# Altium PCB 180222.PcbDoc (part 2 of 5)
Units mil, origin at the board's own origin, x right, y up, seen from the top; angles counter-clockwise.
Board outline 6880.23 x 4505.03 mil, 2 copper layers (Top Layer, Bottom Layer); 136 components, 176 nets, 656 pads, 225 vias.
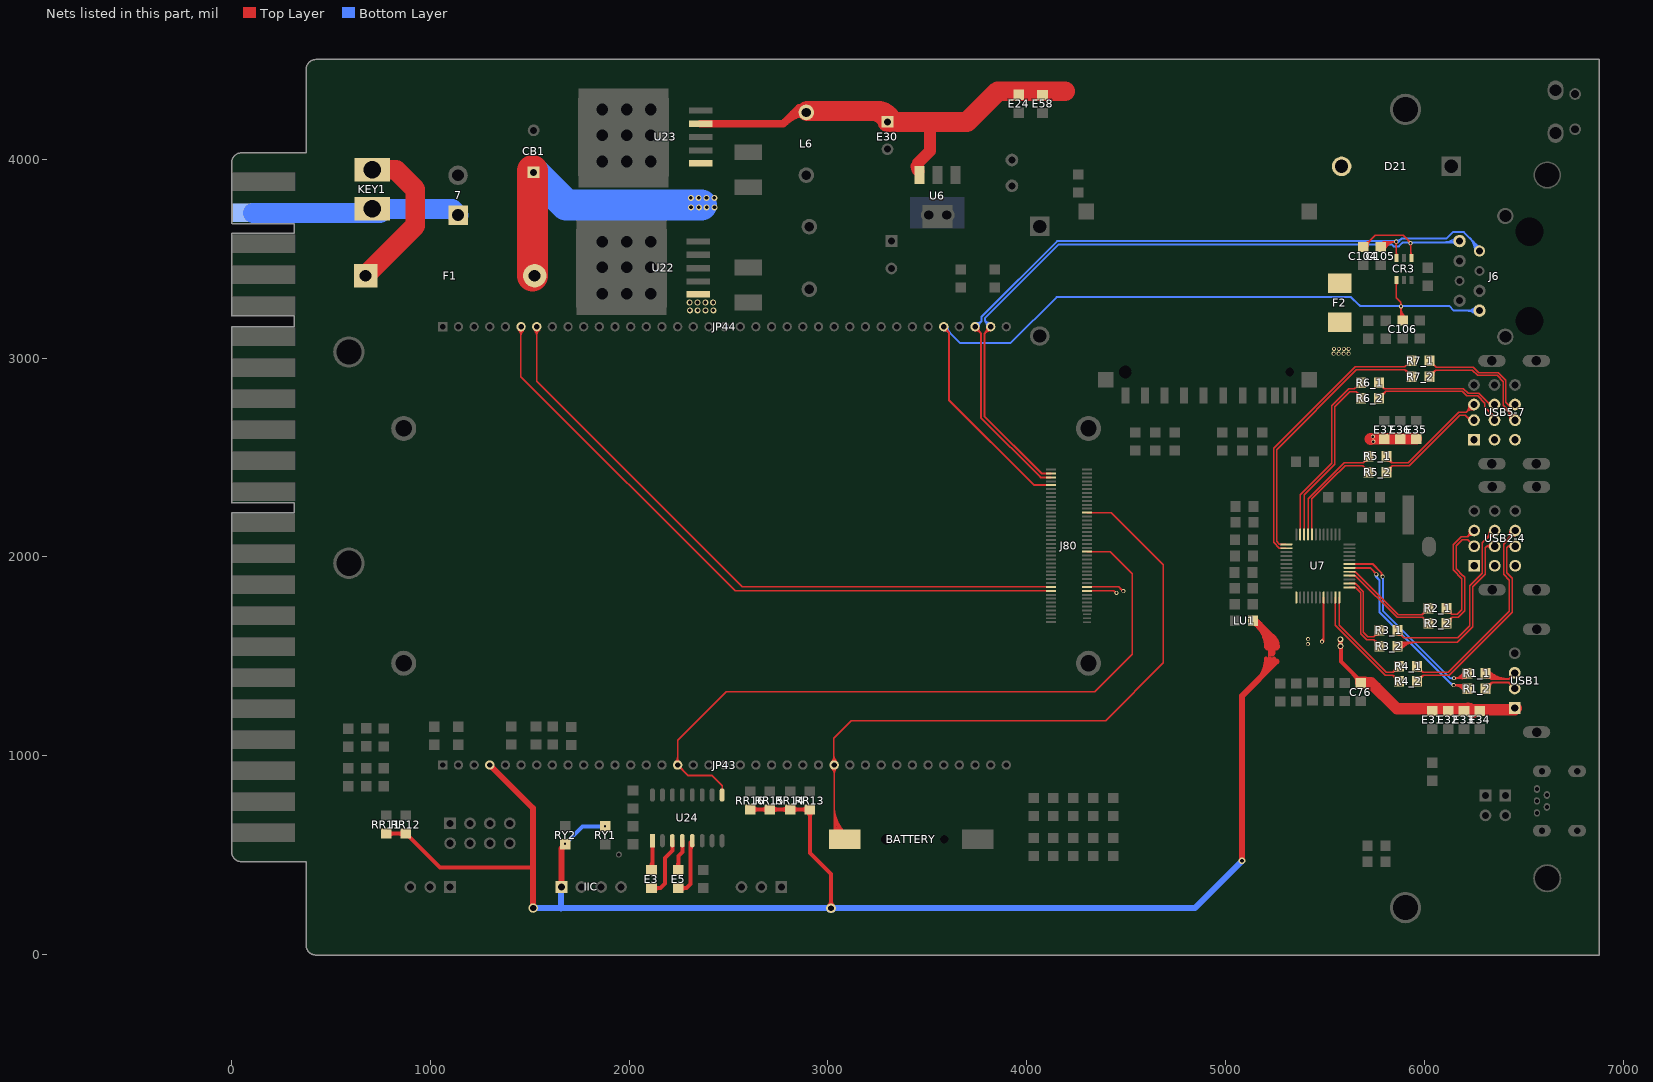
[diagram p2: the nets of this part, all layers, seen from the top]

## Via types
v1: diameter 20, hole 12, Top Layer to Bottom Layer, 169 vias
v2: diameter 30, hole 18, Top Layer to Bottom Layer, 30 vias
v3: diameter 35, hole 20, Top Layer to Bottom Layer, 25 vias
v4: diameter 50, hole 28, Top Layer to Bottom Layer, 1 vias

## Nets (pads, with @x,y where several pads share a name; then routed paths per layer and width w, separated by ;. In a path a pad name is that pad's centre, name@x,y a point inside that pad or via, vN(x,y) a via of type N, cw(c..) or ccw(c..) an arc to the next point about the centre after c; other vN are vias at no path point) (continued)
-TXD_1: J80.19 JP43.16 U24.9 | length 3976.7
  Top Layer w7: JP43.16@2242,952 2244,954 2244,1079 2488,1323 4344,1323 4531,1510 4531,1915 ; J80.19@4303.55,2026.47 4420.11,2026.47 4530.5,1916.09 ; JP43.16@2230.01,961.87 ccw(c2196.22,995.65) 2244,995.65 ; JP43.16@2230.01,961.87 ccw(c2196.22,995.65) 2244,995.65 ; JP43.16@2230.01,961.87 ccw(c2196.22,995.65) 2244,995.65 ; JP43.16@2234.96,956.92 ccw(c2213.12,978.75) 2244,978.75 ; JP43.16@2234.96,956.92 ccw(c2213.12,978.75) 2244,978.75 ; JP43.16@2234.96,956.92 ccw(c2213.12,978.75) 2244,978.75 ; 2244,979.89 ccw(c2276.48,979.89) JP43.16@2253.51,956.92 ; 2244,979.89 ccw(c2276.48,979.89) JP43.16@2253.51,956.92 ; 2244,979.89 ccw(c2276.48,979.89) JP43.16@2253.51,956.92 ; 2244,996.78 ccw(c2293.38,996.78) JP43.16@2258.46,961.87 ; 2244,996.78 ccw(c2293.38,996.78) JP43.16@2258.46,961.87 ; 2244,996.78 ccw(c2293.38,996.78) JP43.16@2258.46,961.87
  Top Layer w10: JP43.16@2244.5,953.64 2296.13,902 2417,902 2469,850 U24.9@2469,793
  Top Layer w15: U24.9@2466,790 U24.9@2466,793
ADC0: J80.9 | length 153.7
  Top Layer w7: J80.9@4303.55,1829.62 4439.38,1829.62 v1@4452,1817
  other v1: 4452,1820
ADC1: J80.72 JP44.6 | length 3738.9
  Top Layer w7: JP44.6@1456,3155 1456,2907 2533.38,1829.62 J80.72@4122.45,1829.62 ; JP44.6@1442.87,3144.13 cw(c1411.16,3112.43) 1456,3112.43 ; JP44.6@1442.87,3144.13 cw(c1411.16,3112.43) 1456,3112.43 ; JP44.6@1442.87,3144.13 cw(c1411.16,3112.43) 1456,3112.43 ; JP44.6@1447.82,3149.08 cw(c1428.06,3129.32) 1456,3129.32 ; JP44.6@1447.82,3149.08 cw(c1428.06,3129.32) 1456,3129.32 ; JP44.6@1447.82,3149.08 cw(c1428.06,3129.32) 1456,3129.32 ; 1456,3107.14 cw(c1508.31,3107.14) JP44.6@1471.32,3144.13 ; 1456,3107.14 cw(c1508.31,3107.14) JP44.6@1471.32,3144.13 ; 1456,3107.14 cw(c1508.31,3107.14) JP44.6@1471.32,3144.13 ; 1456,3124.04 cw(c1491.42,3124.04) JP44.6@1466.37,3149.08 ; 1456,3124.04 cw(c1491.42,3124.04) JP44.6@1466.37,3149.08 ; 1456,3124.04 cw(c1491.42,3124.04) JP44.6@1466.37,3149.08
ADC2: J80.10 | length 240.7
  Top Layer w7: J80.10@4303.55,1849.31 4462.69,1849.31 v1@4485.5,1826.5 ; 4470.78,1841.22 ccw(c4487,1857.43) 4487,1834.5 cw(c4487,1857.43) 4470.78,1841.22 ; 4478.03,1833.97 cw(c4472.05,1828) 4480.5,1828 ccw(c4472.05,1828) 4478.03,1833.97
  other v1: 4487,1828
ADC3: J80.71 JP44.7 | length 3664.2
  Top Layer w7: JP44.7@1536,3155 1536,2884 2570.69,1849.31 J80.71@4122.45,1849.31 ; JP44.7@1521.61,3144.13 cw(c1486.86,3109.38) 1536,3109.38 ; JP44.7@1521.61,3144.13 cw(c1486.86,3109.38) 1536,3109.38 ; JP44.7@1521.61,3144.13 cw(c1486.86,3109.38) 1536,3109.38 ; JP44.7@1526.56,3149.08 cw(c1503.76,3126.28) 1536,3126.28 ; JP44.7@1526.56,3149.08 cw(c1503.76,3126.28) 1536,3126.28 ; JP44.7@1526.56,3149.08 cw(c1503.76,3126.28) 1536,3126.28 ; 1536,3110.18 cw(c1584.01,3110.18) JP44.7@1550.06,3144.13 ; 1536,3110.18 cw(c1584.01,3110.18) JP44.7@1550.06,3144.13 ; 1536,3110.18 cw(c1584.01,3110.18) JP44.7@1550.06,3144.13 ; 1536,3127.08 cw(c1567.11,3127.08) JP44.7@1545.11,3149.08 ; 1536,3127.08 cw(c1567.11,3127.08) JP44.7@1545.11,3149.08 ; 1536,3127.08 cw(c1567.11,3127.08) JP44.7@1545.11,3149.08
ADC23: 
BATTERY: BATTERY.1 J80.29 JP43.26 | length 6668.2
  Top Layer w7: JP43.26@3030,943 3030,1087 3119,1176 4397,1176 4688,1467 4688,1960 4424.68,2223.32 J80.29@4303.55,2223.32 ; BATTERY.1@3031.9,562 JP43.26@3031.9,953.64 ; JP43.26@3017.67,939.41 cw(c2983.32,905.06) 3031.9,905.06 ; JP43.26@3017.67,939.41 cw(c2983.32,905.06) 3031.9,905.06 ; JP43.26@3017.67,939.41 cw(c2983.32,905.06) 3031.9,905.06 ; JP43.26@3017.67,967.87 ccw(c2987.9,997.64) 3030,997.64 ; JP43.26@3017.67,967.87 ccw(c2987.9,997.64) 3030,997.64 ; JP43.26@3017.67,967.87 ccw(c2987.9,997.64) 3030,997.64 ; JP43.26@3022.62,944.36 cw(c3000.22,921.96) 3031.9,921.96 ; JP43.26@3022.62,944.36 cw(c3000.22,921.96) 3031.9,921.96 ; JP43.26@3022.62,944.36 cw(c3000.22,921.96) 3031.9,921.96 ; JP43.26@3022.62,962.92 ccw(c3004.79,980.74) 3030,980.74 ; JP43.26@3022.62,962.92 ccw(c3004.79,980.74) 3030,980.74 ; JP43.26@3022.62,962.92 ccw(c3004.79,980.74) 3030,980.74 ; BATTERY.1@3023.53,612.36 ccw(c3003.32,632.56) 3031.9,632.56 ; BATTERY.1@3023.53,612.36 ccw(c3003.32,632.56) 3031.9,632.56 ; BATTERY.1@3023.53,612.36 ccw(c3003.32,632.56) 3031.9,632.56 ; 3030,989.89 ccw(c3068.15,989.89) JP43.26@3041.17,962.92 ; 3030,989.89 ccw(c3068.15,989.89) JP43.26@3041.17,962.92 ; 3030,989.89 ccw(c3068.15,989.89) JP43.26@3041.17,962.92 ; 3030,1006.79 ccw(c3085.05,1006.79) JP43.26@3046.12,967.87 ; 3030,1006.79 ccw(c3085.05,1006.79) JP43.26@3046.12,967.87 ; 3030,1006.79 ccw(c3085.05,1006.79) JP43.26@3046.12,967.87 ; 3031.9,629.93 ccw(c3105.74,629.93) BATTERY.1@3053.53,577.71 ; 3031.9,629.93 ccw(c3105.74,629.93) BATTERY.1@3053.53,577.71 ; 3031.9,629.93 ccw(c3105.74,629.93) BATTERY.1@3053.53,577.71 ; 3031.9,646.83 ccw(c3122.64,646.83) BATTERY.1@3058.48,582.66 ; 3031.9,646.83 ccw(c3122.64,646.83) BATTERY.1@3058.48,582.66 ; 3031.9,646.83 ccw(c3122.64,646.83) BATTERY.1@3058.48,582.66 ; 3031.9,663.72 ccw(c3139.54,663.72) BATTERY.1@3063.43,587.61 ; 3031.9,663.72 ccw(c3139.54,663.72) BATTERY.1@3063.43,587.61 ; 3031.9,663.72 ccw(c3139.54,663.72) BATTERY.1@3063.43,587.61 ; 3031.9,680.62 ccw(c3156.44,680.62) BATTERY.1@3068.38,592.56 ; 3031.9,680.62 ccw(c3156.44,680.62) BATTERY.1@3068.38,592.56 ; 3031.9,680.62 ccw(c3156.44,680.62) BATTERY.1@3068.38,592.56 ; 3031.9,697.52 ccw(c3173.34,697.52) BATTERY.1@3073.32,597.51 ; 3031.9,697.52 ccw(c3173.34,697.52) BATTERY.1@3073.32,597.51 ; 3031.9,697.52 ccw(c3173.34,697.52) BATTERY.1@3073.32,597.51 ; 3031.9,714.42 ccw(c3190.24,714.42) BATTERY.1@3078.27,602.46 ; 3031.9,714.42 ccw(c3190.24,714.42) BATTERY.1@3078.27,602.46 ; 3031.9,714.42 ccw(c3190.24,714.42) BATTERY.1@3078.27,602.46 ; 3031.9,731.32 ccw(c3207.14,731.32) BATTERY.1@3083.22,607.41 ; 3031.9,731.32 ccw(c3207.14,731.32) BATTERY.1@3083.22,607.41 ; 3031.9,731.32 ccw(c3207.14,731.32) BATTERY.1@3083.22,607.41 ; 3031.9,748.22 ccw(c3224.04,748.22) BATTERY.1@3088.17,612.36 ; 3031.9,748.22 ccw(c3224.04,748.22) BATTERY.1@3088.17,612.36 ; 3031.9,748.22 ccw(c3224.04,748.22) BATTERY.1@3088.17,612.36 ; 3031.9,905.06 cw(c3080.47,905.06) JP43.26@3046.12,939.41 ; 3031.9,905.06 cw(c3080.47,905.06) JP43.26@3046.12,939.41 ; 3031.9,905.06 cw(c3080.47,905.06) JP43.26@3046.12,939.41 ; 3031.9,921.96 cw(c3063.58,921.96) JP43.26@3041.17,944.36 ; 3031.9,921.96 cw(c3063.58,921.96) JP43.26@3041.17,944.36 ; 3031.9,921.96 cw(c3063.58,921.96) JP43.26@3041.17,944.36
C1+: E3.1 U24.1 | length 197.2
  Top Layer w20: E3.1@2102.96,435.93 ccw(c2066.65,472.24) 2118,472.24 ; E3.1@2118,434.91 U24.1@2118,573 ; 2118,452.85 ccw(c2141.93,452.85) E3.1@2125.01,435.93
C1-: E3.2 U24.3 | length 367.2
  Top Layer w20: E3.2@2113,334.35 2157.35,334.35 2181,358 2181,486 2218,523 U24.3@2218,573 ; E3.2@2125.01,323.33 cw(c2151.62,296.72) 2151.62,334.35 cw(c2151.62,371.99) E3.2@2125.01,345.38
C2+: E5.1 U24.4 | length 215.5
  Top Layer w20: E5.1@2236.98,435.93 ccw(c2210.36,462.54) 2248,462.54 ccw(c2285.64,462.54) E5.1@2259.02,435.93 ; E5.1@2248,424.91 2248,496 2268,516 U24.4@2268,573
C2-: E5.2 U24.5 | length 378.3
  Top Layer w20: E5.2@2248,334.35 2288.35,334.35 2309,355 2309,564 U24.5@2318,573 ; E5.2@2260.01,323.33 cw(c2286.62,296.72) 2286.62,334.35 cw(c2286.62,371.99) E5.2@2260.01,345.38 ; 2309,524.97 cw(c2344.58,524.97) U24.5@2319.42,550.12
DC5V: C76.1 E31.1 E32.1 E33.1 E34.1 E35.1 E36.1 E37.1 F2.1 IIC.1 JP43.4 LU1.1 pad.3@1518,234 RR11.2 RR12.2 RR13.2 RR14.2 RR15.2 RR16.2 RY1.1 RY2.2 U7.8 USB1.1 USB2-4.1 USB2-4.5 USB2-4.9 USB5-7.1 USB5-7.5 USB5-7.9 | length 13763.4
  Top Layer w10: 5218,1461 5218,1558 ; 5494.41,1585.41 U7.8@5494.41,1796.89 ; v1@5482.46,1577.54 ccw(c5453.63,1606.37) 5494.41,1606.37 cw(c5453.63,1606.37) v1@5482.46,1577.54 ; v1@5489.54,1570.46 ccw(c5477.77,1582.23) 5494.41,1582.23 cw(c5477.77,1582.23) v1@5489.54,1570.46
  Top Layer w20: RR11.2@778,608.35 RR12.2@878,608.35 1048.35,438 1517,438 ; RR16.2@2609,729.35 2910.65,729.35 2910.65,510.35 3016,405 v4(3016,233) ; v2@5576,1586 5579,1583 v2(5579,1552) ; v2@5581,1561 5581,1474 5674,1381 C76.1@5674,1374 ; RR11.2@790.01,597.33 cw(c816.62,570.72) 816.62,608.35 ; RR11.2@790.01,597.33 cw(c816.62,570.72) 816.62,608.35 ; RR11.2@790.01,597.33 cw(c816.62,570.72) 816.62,608.35 ; RR11.2@790.01,619.38 ccw(c816.62,645.99) 816.62,608.35 ; RR11.2@790.01,619.38 ccw(c816.62,645.99) 816.62,608.35 ; RR11.2@790.01,619.38 ccw(c816.62,645.99) 816.62,608.35 ; 839.38,608.35 cw(c839.38,570.72) RR12.2@865.99,597.33 ; 839.38,608.35 ccw(c839.38,645.99) RR12.2@865.99,619.38 ; 839.38,608.35 cw(c839.38,570.72) RR12.2@865.99,597.33 ; 839.38,608.35 ccw(c839.38,645.99) RR12.2@865.99,619.38 ; 839.38,608.35 ccw(c839.38,645.99) RR12.2@865.99,619.38 ; 839.38,608.35 cw(c839.38,570.72) RR12.2@865.99,597.33 ; RR16.2@2621.01,718.33 cw(c2647.62,691.72) 2647.62,729.35 ; RR16.2@2621.01,718.33 cw(c2647.62,691.72) 2647.62,729.35 ; RR16.2@2621.01,718.33 cw(c2647.62,691.72) 2647.62,729.35 ; RR16.2@2621.01,740.38 ccw(c2647.62,766.99) 2647.62,729.35 ; RR16.2@2621.01,740.38 ccw(c2647.62,766.99) 2647.62,729.35 ; RR16.2@2621.01,740.38 ccw(c2647.62,766.99) 2647.62,729.35 ; 2670.38,729.35 cw(c2670.38,691.72) RR15.2@2696.99,718.33 ; 2670.38,729.35 ccw(c2670.38,766.99) RR15.2@2696.99,740.38 ; 2670.38,729.35 cw(c2670.38,691.72) RR15.2@2696.99,718.33 ; 2670.38,729.35 ccw(c2670.38,766.99) RR15.2@2696.99,740.38 ; 2670.38,729.35 ccw(c2670.38,766.99) RR15.2@2696.99,740.38 ; 2670.38,729.35 cw(c2670.38,691.72) RR15.2@2696.99,718.33 ; RR15.2@2721.01,718.33 cw(c2747.62,691.72) 2747.62,729.35 ; RR15.2@2721.01,718.33 cw(c2747.62,691.72) 2747.62,729.35 ; RR15.2@2721.01,718.33 cw(c2747.62,691.72) 2747.62,729.35 ; RR15.2@2721.01,740.38 ccw(c2747.62,766.99) 2747.62,729.35 ; RR15.2@2721.01,740.38 ccw(c2747.62,766.99) 2747.62,729.35 ; RR15.2@2721.01,740.38 ccw(c2747.62,766.99) 2747.62,729.35 ; 2771.38,729.35 cw(c2771.38,691.72) RR14.2@2797.99,718.33 ; 2771.38,729.35 ccw(c2771.38,766.99) RR14.2@2797.99,740.38 ; 2771.38,729.35 cw(c2771.38,691.72) RR14.2@2797.99,718.33 ; 2771.38,729.35 ccw(c2771.38,766.99) RR14.2@2797.99,740.38 ; 2771.38,729.35 ccw(c2771.38,766.99) RR14.2@2797.99,740.38 ; 2771.38,729.35 cw(c2771.38,691.72) RR14.2@2797.99,718.33 ; RR14.2@2822.01,718.33 cw(c2848.62,691.72) 2848.62,729.35 ; RR14.2@2822.01,718.33 cw(c2848.62,691.72) 2848.62,729.35 ; RR14.2@2822.01,718.33 cw(c2848.62,691.72) 2848.62,729.35 ; RR14.2@2822.01,740.38 ccw(c2848.62,766.99) 2848.62,729.35 ; RR14.2@2822.01,740.38 ccw(c2848.62,766.99) 2848.62,729.35 ; RR14.2@2822.01,740.38 ccw(c2848.62,766.99) 2848.62,729.35 ; 2870.38,729.35 cw(c2870.38,691.72) RR13.2@2896.99,718.33 ; 2870.38,729.35 ccw(c2870.38,766.99) RR13.2@2896.99,740.38 ; 2870.38,729.35 cw(c2870.38,691.72) RR13.2@2896.99,718.33 ; 2870.38,729.35 ccw(c2870.38,766.99) RR13.2@2896.99,740.38 ; 2870.38,729.35 ccw(c2870.38,766.99) RR13.2@2896.99,740.38 ; 2870.38,729.35 cw(c2870.38,691.72) RR13.2@2896.99,718.33 ; RR13.2@2898.96,718.33 cw(c2870.75,690.12) 2910.65,690.12 ; RR13.2@2898.96,718.33 cw(c2870.75,690.12) 2910.65,690.12 ; RR13.2@2898.96,718.33 cw(c2870.75,690.12) 2910.65,690.12 ; 2910.65,693.31 cw(c2946.03,693.31) RR13.2@2921.01,718.33 ; 2910.65,693.31 cw(c2946.03,693.31) RR13.2@2921.01,718.33 ; 2910.65,693.31 cw(c2946.03,693.31) RR13.2@2921.01,718.33 ; v4@3005.39,243.61 ccw(c2979.79,269.21) 3016,269.21 ; v4@3005.39,243.61 ccw(c2979.79,269.21) 3016,269.21 ; v4@3005.39,243.61 ccw(c2979.79,269.21) 3016,269.21 ; 3016,269.21 ccw(c3052.21,269.21) v4@3026.61,243.61 ; 3016,269.21 ccw(c3052.21,269.21) v4@3026.61,243.61 ; 3016,269.21 ccw(c3052.21,269.21) v4@3026.61,243.61 ; v3@5078.7,477.3 ccw(c5065.89,490.11) 5084,490.11 ; v3@5078.7,477.3 ccw(c5065.89,490.11) 5084,490.11 ; v3@5078.7,477.3 ccw(c5065.89,490.11) 5084,490.11 ; 5084,490.11 ccw(c5102.11,490.11) v3@5089.3,477.3 ; 5084,490.11 ccw(c5102.11,490.11) v3@5089.3,477.3 ; 5084,490.11 ccw(c5102.11,490.11) v3@5089.3,477.3 ; v2@5575.46,1548.46 cw(c5562.1,1535.1) 5581,1535.1 ; v2@5575.46,1548.46 cw(c5562.1,1535.1) 5581,1535.1 ; v2@5575.46,1548.46 cw(c5562.1,1535.1) 5581,1535.1 ; 5645.28,1409.72 cw(c5601.46,1365.91) C76.1@5663.43,1365.91 ; 5645.28,1409.72 cw(c5601.46,1365.91) C76.1@5663.43,1365.91 ; 5645.28,1409.72 cw(c5601.46,1365.91) C76.1@5663.43,1365.91 ; 5154.95,1372.95 ccw(c5037.43,1490.47) 5203.63,1490.47 cw(c5037.43,1490.47) 5154.95,1372.95 ; 5189.09,1407.09 ccw(c5105.71,1490.47) 5223.63,1490.47 cw(c5105.71,1490.47) 5189.09,1407.09 ; 5223.24,1441.24 ccw(c5174,1490.47) 5243.63,1490.47 cw(c5174,1490.47) 5223.24,1441.24
  Top Layer w30: JP43.4@1299.61,953.64 1517,736.25 1517,438 pad.3@1517,235 ; IIC.1@1660,340 1660,533 RY2.2@1688,561 ; v3(5084,472) 5084,1302 5256,1474
  Top Layer w40: LU1.1@5145,1682 5233,1594 ; 5168.49,1658.51 cw(c5059.5,1549.53) 5213.63,1549.53 ; 5219.3,1563.22 ccw(c5186.24,1596.29) 5233,1596.29 ccw(c5279.76,1596.29) 5246.7,1563.22 ; 5219.81,1563.71 ccw(c5191.64,1594) 5233,1594 ; 5233,1520 5233,1594 ; 5236.77,1590.23 cw(c5196.07,1549.53) 5253.63,1549.53 ; 5246.19,1563.71 cw(c5274.36,1594) 5233,1594 ; LU1.1@5138.91,1673.42 cw(c5138.91,1638.01) 5163.95,1663.05 ccw(c5138.91,1638.01) LU1.1@5138.91,1673.42
  Top Layer w59.06: C76.1@5690,1368 5732,1368 5863.1,1236.9 E33.1@6221.1,1236.9 ; 5730.19,2593.81 cw(c5730.88,2593.12) 5730.88,2594.09 ; 5750.09,2594.09 E37.1@5800,2594.09 E36.1@5880,2594.09 E35.1@5960,2594.09 ; E33.1@6220,1238 E33.1@6221.1,1236.9 ; 6228.05,1232.95 E33.1@6224.1,1236.9 ; 6230,1231 6455,1231 USB1.1@6463,1239 ; 6232,1236.9 E33.1@6224.1,1236.9 ; C76.1@5680.64,1369.83 cw(c5689.15,1272.04) 5758.55,1341.45 ; C76.1@5680.64,1369.83 cw(c5689.15,1272.04) 5758.55,1341.45 ; C76.1@5680.64,1369.83 cw(c5689.15,1272.04) 5758.55,1341.45 ; C76.1@5680.99,1369.84 cw(c5680.99,1251.13) 5764.93,1335.07 ; C76.1@5680.99,1369.84 cw(c5680.99,1251.13) 5764.93,1335.07 ; C76.1@5680.99,1369.84 cw(c5680.99,1251.13) 5764.93,1335.07 ; E33.1@6200.26,1229.78 cw(c6209.52,1180.31) 6245.1,1215.9 ; E33.1@6200.26,1229.78 cw(c6209.52,1180.31) 6245.1,1215.9 ; E33.1@6200.26,1229.78 cw(c6209.52,1180.31) 6245.1,1215.9 ; E33.1@6221.1,1236.9 E33.1@6224.1,1236.9
  Bottom Layer w20: v1(1678,557) 1766,645 v1(1879,645) v1@1881,645 ; 2977.49,233.95 cw(c2977.49,194.49) v4@3005.39,222.39 ; 2977.49,233.95 cw(c2977.49,194.49) v4@3005.39,222.39 ; 2977.49,233.95 cw(c2977.49,194.49) v4@3005.39,222.39 ; 2982.09,233.95 ccw(c2982.09,266.91) v4@3005.39,243.61 ; 2982.09,233.95 ccw(c2982.09,266.91) v4@3005.39,243.61 ; 2982.09,233.95 ccw(c2982.09,266.91) v4@3005.39,243.61 ; v4@3026.61,222.39 cw(c3054.51,194.49) 3054.51,233.95 ; v4@3026.61,222.39 cw(c3054.51,194.49) 3054.51,233.95 ; v4@3026.61,222.39 cw(c3054.51,194.49) 3054.51,233.95 ; v4@3026.61,243.61 ccw(c3049.91,266.91) 3049.91,233.95 ; v4@3026.61,243.61 ccw(c3049.91,266.91) 3049.91,233.95 ; v4@3026.61,243.61 ccw(c3049.91,266.91) 3049.91,233.95 ; 5071.2,459.2 cw(c5084,446.39) v3@5084,464.5 ; 5071.2,459.2 ccw(c5058.39,472) v3@5076.5,472 ; 5071.2,459.2 cw(c5084,446.39) v3@5084,464.5 ; 5071.2,459.2 ccw(c5058.39,472) v3@5076.5,472 ; 5071.2,459.2 ccw(c5058.39,472) v3@5076.5,472 ; 5071.2,459.2 cw(c5084,446.39) v3@5084,464.5
  Bottom Layer w30: pad.3@1514,233.95 1658,233.95 ; 1658,231 1658,233.95 ; IIC.1@1660,340 1658,338 1658,233.95 ; v3(5084,472) 4845.95,233.95 1658,233.95
  other v1: 5415,1562 5486,1574 5416,1587 5744,2580 5742,2605 5544,3023 5569.33,3023 5594.67,3023 5620,3023 5546,3047 5570.67,3047 5595.33,3047 5620,3047
  other v2: 5578,1586
DC5V_I: D21.2 E24.1 E30.1@3300,4188.9 E58.2 F2.2 L6.1 U6.3 U23.4 | length 2831.4
  Top Layer w39.37: U23.4@2360.3,4178.93 2775.93,4178.93 2855,4258 L6.1@2899,4258 ; 2824.89,4227.89 cw(c2892,4160.77) L6.1@2892,4255.68 ; 2784.99,4187.99 cw(c2900,4072.98) 2900,4235.63 ccw(c2900,4072.98) 2784.99,4187.99
  Top Layer w59.06: U6.3@3454,3946 3454,3982 3513.65,4041.65 3513.65,4188.9 3513.65,4191.35 ; U6.3@3446.65,3965.73 ccw(c3484.95,3965.73) U6.3@3457.87,3938.65 ; U6.3@3446.65,3965.73 ccw(c3484.95,3965.73) U6.3@3457.87,3938.65 ; U6.3@3446.65,3965.73 ccw(c3484.95,3965.73) U6.3@3457.87,3938.65
  Top Layer w100: L6.1@2896,4243 3254,4243 ; 3218.61,4243 cw(c3218.61,4107.71) E30.1@3314.28,4203.37 ; E30.1@3297,4200 3254,4243 ; E30.1@3300,4188.9 3513.65,4188.9 3700.9,4188.9 3855,4343 4194,4343 ; E30.1@3319.34,4195.03 ccw(c3254,4174.52) 3254,4243
DC12_F: F1.1 KEY1.2 | length 785.7
  Top Layer w100: F1.1@681,3422 925,3666 925,3850 827,3948 KEY1.2@709,3948
DC12_L: CB1.1 F1.2 U22.1 U23.1 | length 1442
  Top Layer w100: CB1.1@1514,3944 CB1.1@1514.2,3943.8
  Top Layer w157: F1.2@1514.2,3415 CB1.1@1514.2,3943.8
  Bottom Layer w157.48: CB1.1@1520,3935 1684,3771 2365,3771
  other v2: 2306,3241 2345.33,3241 2384.67,3241 2424,3241 2305,3280 2344.33,3280 2383.67,3280 2423,3280 2312,3759 2351.33,3759 2390.67,3759 2430,3759 2311,3806 2350.33,3806 2389.67,3806 2429,3806
DC_12: 
DC_GND: 
DC_IN: 7.1 KEY1.1 pad.B | length 1101.4
  Bottom Layer w100: pad.B@108,3731.1 pad.B@164,3731.1 494.1,3731.1 ; 480,3730 KEY1.1@748,3730 ; KEY1.1@709,3751.15 1110.85,3751.15 7.1@1143,3719
DM1: R1_2.2 U7.18 | length 1576.1
  Top Layer w10: U7.18@5623.35,1945.51 5727.49,1945.51 v1@5762.5,1910.5 ; R1_2.2@6194,1355 v1(6148,1355) ; v1(6148,1355) cw(c6148,1289.69) R1_2.2@6201.49,1327.17 ; v1(6148,1355) cw(c6148,1289.69) R1_2.2@6201.49,1327.17 ; v1(6148,1355) cw(c6148,1289.69) R1_2.2@6201.49,1327.17 ; v1@6151.54,1351.46 cw(c6160.07,1342.93) 6160.07,1355 ; v1@6151.54,1351.46 cw(c6160.07,1342.93) 6160.07,1355 ; v1@6151.54,1351.46 cw(c6160.07,1342.93) 6160.07,1355 ; v1@6151.54,1358.54 ccw(c6160.07,1367.07) 6160.07,1355 ; v1@6151.54,1358.54 ccw(c6160.07,1367.07) 6160.07,1355 ; v1@6151.54,1358.54 ccw(c6160.07,1367.07) 6160.07,1355 ; 6167.22,1355 cw(c6167.22,1303.15) R1_2.2@6209.68,1332.91 ; 6167.22,1355 cw(c6167.22,1303.15) R1_2.2@6209.68,1332.91 ; 6167.22,1355 cw(c6167.22,1303.15) R1_2.2@6209.68,1332.91 ; 6186.44,1355 cw(c6186.44,1316.62) R1_2.2@6217.87,1338.64 ; 6186.44,1355 cw(c6186.44,1316.62) R1_2.2@6217.87,1338.64 ; 6186.44,1355 cw(c6186.44,1316.62) R1_2.2@6217.87,1338.64 ; 5750.26,1922.74 cw(c5740.01,1912.5) 5754.5,1912.5 ccw(c5740.01,1912.5) 5750.26,1922.74 ; 5752.67,1920.33 ccw(c5759.5,1927.16) 5759.5,1917.5 cw(c5759.5,1927.16) 5752.67,1920.33
  Bottom Layer w10: v1(5759.5,1912.5) 5759.5,1898.5 5775.17,1882.83 5775.17,1721.79 6137.27,1359.69 v1@6144.69,1359.69 ; v1@5754.89,1914.44 ccw(c5766.75,1909.45) 5757.65,1900.35 cw(c5766.75,1909.45) v1@5754.89,1914.44 ; v1@5764.11,1910.56 ccw(c5781.55,1903.21) 5768.17,1889.83 cw(c5781.55,1903.21) v1@5764.11,1910.56 ; 6129.15,1367.81 ccw(c6148,1386.66) 6148,1360 cw(c6148,1386.66) 6129.15,1367.81
DM1_1: R1_2.1 USB1.2 | length 242.4
  Top Layer w10: R1_2.1@6308.91,1338 6311,1338 6342,1369 ; R1_2.1@6312.15,1359.32 ccw(c6317.59,1393.41) 6342,1369 ; R1_2.1@6329.5,1338.98 cw(c6371.78,1338.98) 6341.88,1368.88 ; USB1.2@6459,1336 6457,1336 6424,1369 6342,1369
DM2: R2_2.2 U7.16 | length 580.9
  Top Layer w7: U7.16@5623.35,1906.14 5654.06,1906.14 5864.2,1696 5993,1696 R2_2.2@6003,1686 ; U7.16@5648.94,1904.72 cw(c5648.94,1888.91) 5660.11,1900.09 ; U7.16@5649.53,1904.85 cw(c5652.16,1899.11) 5656.63,1903.57 ; R2_2.2@6000.67,1671.23 ccw(c5973.82,1676.48) 5993.17,1695.83 ccw(c6012.1,1714.76) R2_2.2@6017.72,1688.58 ; R2_2.2@6002.27,1686.73 ccw(c6015.32,1699.79) R2_2.2@6019.19,1681.74 ; R2_2.2@6002.46,1686.54 cw(c5989.37,1673.44) R2_2.2@6007.54,1669.88
DM2_1: R2_2.1 USB2-4.2 | length 717
  Top Layer w7: R2_2.1@6127,1688 6131,1688 6140,1697 ; USB2-4.2@6243,2063 6220,2086 6191.38,2086 6161,2055.62 6161,1940 6195,1906 6195.8,1906 6204,1897.8 6204,1730 6171,1697 6140,1697 ; 6140,1697 cw(c6119.75,1717.25) 6115.89,1688.87 ccw(c6119.75,1717.25) 6140,1697 ; 6140,1697 ccw(c6156.79,1680.21) 6134.06,1673.36 cw(c6156.79,1680.21) 6140,1697 ; R2_2.1@6114.94,1681.94 ccw(c6117.36,1699.68) 6130.02,1687.02 cw(c6117.36,1699.68) R2_2.1@6114.94,1681.94 ; R2_2.1@6127.35,1671.34 cw(c6144.07,1676.38) 6131.72,1688.72 ccw(c6144.07,1676.38) R2_2.1@6127.35,1671.34
DM3: R3_2.2 U7.13 | length 481.1
  Top Layer w7: U7.13@5623.35,1847.08 5652.53,1847.08 5680,1819.62 5680,1614.62 5711.62,1583 5746,1583 5754,1575 R3_2.2@5760,1575 ; U7.13@5648.94,1845.66 cw(c5648.94,1833.55) 5657.5,1842.11 ; R3_2.2@5753.66,1556.16 ccw(c5723.33,1561.99) 5745.17,1583.83 ccw(c5769.47,1608.13) R3_2.2@5773.05,1573.95 ; R3_2.2@5754.5,1574.5 cw(c5738.98,1558.98) R3_2.2@5760.54,1554.83 ; R3_2.2@5755.55,1573.45 ccw(c5771.44,1589.34) R3_2.2@5773.78,1566.99
DM3_1: R3_2.1 USB2-4.6 | length 2138.6
  Top Layer w7: R3_2.1@5881,1572 6167,1572 6243,1648 6243,1849.2 6307,1913.2 6307,2047 6314.29,2054.29 ; USB2-4.6@6354.76,2054.29 6314.29,2054.29 ; R3_2.1@5856.78,1561.11 cw(c5883.06,1534.83) R3_2.1@5883.06,1572 ; R3_2.1@5856.78,1561.11 cw(c5883.06,1534.83) R3_2.1@5883.06,1572 ; R3_2.1@5856.78,1561.11 cw(c5883.06,1534.83) R3_2.1@5883.06,1572 ; R3_2.1@5861.73,1556.16 cw(c5899.96,1517.93) 5899.96,1572 ; R3_2.1@5861.73,1556.16 cw(c5899.96,1517.93) 5899.96,1572 ; R3_2.1@5861.73,1556.16 cw(c5899.96,1517.93) 5899.96,1572 ; R3_2.1@5866.68,1551.21 cw(c5916.86,1501.03) 5916.86,1572 ; R3_2.1@5866.68,1551.21 cw(c5916.86,1501.03) 5916.86,1572 ; R3_2.1@5866.68,1551.21 cw(c5916.86,1501.03) 5916.86,1572 ; R3_2.1@5871.63,1546.26 cw(c5933.76,1484.13) 5933.76,1572 ; R3_2.1@5871.63,1546.26 cw(c5933.76,1484.13) 5933.76,1572 ; R3_2.1@5871.63,1546.26 cw(c5933.76,1484.13) 5933.76,1572 ; R3_2.1@5876.58,1541.31 cw(c5950.66,1467.23) 5950.66,1572 ; R3_2.1@5876.58,1541.31 cw(c5950.66,1467.23) 5950.66,1572 ; R3_2.1@5876.58,1541.31 cw(c5950.66,1467.23) 5950.66,1572 ; R3_2.1@5881.53,1536.36 cw(c5967.56,1450.33) 5967.56,1572 ; R3_2.1@5881.53,1536.36 cw(c5967.56,1450.33) 5967.56,1572 ; R3_2.1@5881.53,1536.36 cw(c5967.56,1450.33) 5967.56,1572 ; 6314.29,2054.29 cw(c6314.29,2035.84) 6331.08,2043.49 ccw(c6314.29,2035.84) 6314.29,2054.29 ; 6314.29,2054.29 ccw(c6314.29,2072.74) 6331.08,2065.09 cw(c6314.29,2072.74) 6314.29,2054.29 ; 6325.18,2054.29 cw(c6325.18,2040.8) 6337.45,2046.4 ccw(c6325.18,2040.8) 6325.18,2054.29 ; 6325.18,2054.29 ccw(c6325.18,2067.78) 6337.45,2062.18 cw(c6325.18,2067.78) 6325.18,2054.29
DM4: R4_2.2 U7.11 | length 758.6
  Top Layer w7: U7.11@5553.46,1796.89 5553.46,1655.54 5803,1406 5842,1406 R4_2.2@5857,1391 ; 5842.17,1405.83 cw(c5818.94,1382.6) 5851.48,1378.04 ccw(c5818.94,1382.6) 5842.17,1405.83 ; 5842.17,1405.83 ccw(c5864.91,1428.57) 5869.91,1396.8 cw(c5864.91,1428.57) 5842.17,1405.83 ; R4_2.2@5851.89,1396.11 ccw(c5867.55,1411.77) 5871,1389.89 cw(c5867.55,1411.77) R4_2.2@5851.89,1396.11 ; R4_2.2@5852.11,1395.89 cw(c5836.37,1380.16) 5858.41,1377.07 ccw(c5836.37,1380.16) R4_2.2@5852.11,1395.89
DM4_1: R4_2.1 USB2-4.10 | length 1181.9
  Top Layer w7: R4_2.1@5963.91,1374 5994.91,1405 ; R4_2.1@5966.7,1389.81 ccw(c5970.61,1410.55) R4_2.1@5985.53,1395.63 ; R4_2.1@5968,1396.69 ccw(c5973.59,1426.32) 5994.91,1405 ; R4_2.1@5978.86,1377.02 cw(c6000.04,1379.9) R4_2.1@5984.92,1395.02 ; R4_2.1@5985.79,1377.96 cw(c6017.61,1382.29) 5994.91,1405 ; USB2-4.10@6457.91,2054.29 6423.29,2054.29 ; 5994.91,1405 6126.38,1405 6443,1721.62 6443,1892 6415,1920 6415,2046 6423.29,2054.29 ; 6423.29,2054.29 cw(c6423.29,2044.28) USB2-4.10@6432.91,2047.06 ; 6423.29,2054.29 ccw(c6423.29,2064.3) USB2-4.10@6432.91,2061.52 ; 6423.29,2054.29 cw(c6423.29,2044.28) USB2-4.10@6432.91,2047.06 ; 6423.29,2054.29 ccw(c6423.29,2064.3) USB2-4.10@6432.91,2061.52 ; 6423.29,2054.29 ccw(c6423.29,2064.3) USB2-4.10@6432.91,2061.52 ; 6423.29,2054.29 cw(c6423.29,2044.28) USB2-4.10@6432.91,2047.06
DM5: R5_2.2 U7.32 | length 522.2
  Top Layer w7: U7.32@5435.35,2115 U7.32@5435.35,2113.81 5435.35,2292.35 5536,2393 ; 5539,2396 5536,2393 ; R5_2.2@5700,2450 5690,2460 5603,2460 5536,2393
DM5_1: R5_2.1 USB5-7.2 | length 685.1
  Top Layer w7: R5_2.1@5811.95,2442.94 ccw(c5814.85,2464.19) R5_2.1@5830.02,2449.02 ; R5_2.1@5812.89,2449.87 ccw(c5817.25,2481.75) 5840,2459 ; R5_2.1@5824.74,2430.74 cw(c5845.58,2434.61) R5_2.1@5830.59,2449.59 ; R5_2.1@5831,2450 5840,2459 ; R5_2.1@5831.63,2432.02 cw(c5861.44,2437.55) 5840,2459 ; USB5-7.2@6250.61,2688.29 6232.71,2688.29 6207,2714 6179.8,2714 5924.8,2459 5840,2459 ; 6218.84,2702.16 cw(c6204.98,2688.29) USB5-7.2@6224.59,2688.29 ; 6218.84,2702.16 cw(c6204.98,2688.29) USB5-7.2@6224.59,2688.29 ; 6218.84,2702.16 cw(c6204.98,2688.29) USB5-7.2@6224.59,2688.29
DM6: R6_2.2 U7.34 | length 959
  Top Layer w7: U7.34@5396,2114 5396,2236 ; 5396,2237 5396,2312 5549.31,2465.31 5549.31,2755.31 5550.11,2755.31 5625.8,2831 5657,2831 R6_2.2@5665,2823 ; 5656.72,2831.28 ccw(c5681.35,2855.91) 5681.35,2821.07 cw(c5681.35,2855.91) 5656.72,2831.28 ; 5661.32,2826.68 cw(c5645.09,2810.46) 5666.97,2803.54 ccw(c5645.09,2810.46) 5661.32,2826.68
DM6_1: R6_2.1 USB5-7.6 | length 1164.4
  Top Layer w7: R6_2.1@5771.91,2798 5806.91,2833 ; R6_2.1@5773.24,2814.02 ccw(c5775.79,2842.91) R6_2.1@5796.3,2822.4 ; R6_2.1@5773.85,2820.99 ccw(c5777.52,2862.38) 5806.91,2833 ; R6_2.1@5786.98,2799.6 cw(c5816.51,2800.81) R6_2.1@5795.62,2821.71 ; R6_2.1@5793.98,2799.89 cw(c5838.2,2801.7) 5806.91,2833 ; USB5-7.6@6353.76,2688.29 6353.76,2705.24 6305,2754 6305,2773.62 6268.62,2810 6214.62,2810 6191.62,2833 5806.91,2833 ; 6309.3,2749.7 cw(c6247.89,2688.29) 6334.74,2688.29 ccw(c6247.89,2688.29) 6309.3,2749.7 ; 6321.25,2737.75 cw(c6271.79,2688.29) 6341.74,2688.29 ccw(c6271.79,2688.29) 6321.25,2737.75 ; 6333.2,2725.8 cw(c6295.69,2688.29) 6348.74,2688.29 ccw(c6295.69,2688.29) 6333.2,2725.8 ; 6338.26,2720.74 ccw(c6353.76,2736.25) 6353.76,2714.32 cw(c6353.76,2736.25) 6338.26,2720.74
DM7: R7_2.2 U7.37 | length 1477
  Top Layer w7: U7.37@5282,2064 U7.37@5282,2065 ; U7.37@5303,2065 U7.37@5282,2065 ; R7_2.2@5912.4,2932.6 cw(c5892.74,2912.93) R7_2.2@5920.36,2909.72 ; R7_2.2@5913.41,2910.53 ccw(c5874.4,2915.06) 5902.17,2942.83 ccw(c5933.06,2973.72) R7_2.2@5934.58,2930.06 ; R7_2.2@5913.55,2931.45 ccw(c5933.83,2951.72) R7_2.2@5934.83,2923.06 ; R7_2.2@5916,2929 5903,2942 5658.41,2942 5257,2540.59 5257,2080 5272,2065 U7.37@5282,2065 ; 5274.06,2065 cw(c5274.06,2056.85) 5279.82,2062.61 ccw(c5274.06,2056.85) 5274.06,2065
DM7_1: R7_2.1 USB5-7.10 | length 1221.1
  Top Layer w7: R7_2.1@6025.91,2907 6025.91,2907.91 6058,2940 ; R7_2.1@6027.76,2922.96 ccw(c6030.75,2946.99) R7_2.1@6047.87,2929.87 ; R7_2.1@6028.63,2929.91 ccw(c6032.98,2965.02) 6058,2940 ; R7_2.1@6040.89,2909.78 cw(c6064.96,2912.67) R7_2.1@6047.82,2929.82 ; R7_2.1@6047.84,2910.62 cw(c6083.14,2914.86) 6058,2940 ; USB5-7.10@6462,2697 6397,2762 6397,2882.62 6366.62,2913 6269,2913 6242,2940 6058,2940 ; 6402.73,2756.27 cw(c6334.75,2688.29) 6430.89,2688.29 ccw(c6334.75,2688.29) 6402.73,2756.27 ; 6414.68,2744.32 cw(c6358.64,2688.29) 6437.89,2688.29 ccw(c6358.64,2688.29) 6414.68,2744.32 ; 6426.63,2732.37 cw(c6382.54,2688.29) 6444.89,2688.29 ccw(c6382.54,2688.29) 6426.63,2732.37 ; 6436.03,2722.97 ccw(c6456.91,2743.85) 6456.91,2714.32 cw(c6456.91,2743.85) 6436.03,2722.97 ; 6438.58,2720.42 cw(c6406.44,2688.29) 6451.89,2688.29 ccw(c6406.44,2688.29) 6438.58,2720.42
DP1: R1_1.2 U7.19 | length 1812.4
  Top Layer w10: U7.19@5623.35,1965.19 5739.81,1965.19 5785,1920 ; v1@5785,1906 5785,1920 ; R1_1.2@6199,1397 6192,1390 v1(6150,1390) ; 5785,1920 ccw(c5801.91,1920) 5793.49,1905.34 cw(c5801.91,1920) 5785,1920 ; v1(6150,1390) ccw(c6150,1444.08) R1_1.2@6199.51,1422.31 ; v1(6150,1390) ccw(c6150,1444.08) R1_1.2@6199.51,1422.31 ; v1(6150,1390) ccw(c6150,1444.08) R1_1.2@6199.51,1422.31 ; v1@6153.54,1386.46 cw(c6162.07,1377.93) 6162.07,1390 ; v1@6153.54,1386.46 cw(c6162.07,1377.93) 6162.07,1390 ; v1@6153.54,1386.46 cw(c6162.07,1377.93) 6162.07,1390 ; v1@6153.54,1393.54 ccw(c6162.07,1402.07) 6162.07,1390 ; v1@6153.54,1393.54 ccw(c6162.07,1402.07) 6162.07,1390 ; v1@6153.54,1393.54 ccw(c6162.07,1402.07) 6162.07,1390 ; 6165.33,1390 ccw(c6165.33,1437.34) R1_1.2@6208.66,1418.28 ; 6165.33,1390 ccw(c6165.33,1437.34) R1_1.2@6208.66,1418.28 ; 6165.33,1390 ccw(c6165.33,1437.34) R1_1.2@6208.66,1418.28 ; 6180.65,1390 ccw(c6180.65,1430.6) R1_1.2@6217.81,1414.25 ; 6180.65,1390 ccw(c6180.65,1430.6) R1_1.2@6217.81,1414.25 ; 6180.65,1390 ccw(c6180.65,1430.6) R1_1.2@6217.81,1414.25 ; 6190.83,1388.83 cw(c6206.21,1373.45) R1_1.2@6212.45,1394.29 ; 6190.83,1388.83 ccw(c6172.76,1406.9) R1_1.2@6198.01,1410.84 ; 6190.83,1388.83 cw(c6206.21,1373.45) R1_1.2@6212.45,1394.29 ; 6190.83,1388.83 ccw(c6172.76,1406.9) R1_1.2@6198.01,1410.84 ; 6190.83,1388.83 ccw(c6172.76,1406.9) R1_1.2@6198.01,1410.84 ; 6190.83,1388.83 cw(c6206.21,1373.45) R1_1.2@6212.45,1394.29 ; R1_1.2@6195.97,1390 ccw(c6195.97,1423.86) R1_1.2@6226.97,1410.23 ; R1_1.2@6195.97,1390 ccw(c6195.97,1423.86) R1_1.2@6226.97,1410.23 ; R1_1.2@6195.97,1390 ccw(c6195.97,1423.86) R1_1.2@6226.97,1410.23
  Bottom Layer w10: v1@5787.46,1897.46 cw(c5775.31,1885.31) 5792.5,1885.31 ; v1(5791,1901) 5792.5,1899.5 5792.5,1728.5 6131,1390 v1@6149,1390 ; 6137.93,1390 cw(c6137.93,1377.93) 6146.46,1386.46 ccw(c6137.93,1377.93) 6137.93,1390 ; 6137.93,1390 ccw(c6137.93,1402.07) 6146.46,1393.54 cw(c6137.93,1402.07) 6137.93,1390
DP1_1: R1_1.1 USB1.3 | length 563.5
  Top Layer w10: R1_1.1@6302.24,1407.37 ccw(c6353.72,1458.69) 6353.72,1386 ; R1_1.1@6307.91,1416 6336.91,1387 ; R1_1.1@6309.32,1414.43 ccw(c6377.81,1482.71) 6377.81,1386 ; R1_1.1@6312.43,1394.73 cw(c6317.5,1365.61) 6338.4,1386.51 ; R1_1.1@6316.41,1421.49 ccw(c6401.9,1506.72) 6401.9,1386 ; R1_1.1@6323.49,1428.55 ccw(c6425.99,1530.74) 6425.99,1386 ; R1_1.1@6328.35,1413.59 ccw(c6359.76,1409.87) 6337.4,1387.51 ; 6337.91,1386 6426,1386 ; USB1.3@6451,1411 6426,1386
DP2: R2_1.2 U7.17 | length 614.2
  Top Layer w7: U7.17@5623.35,1925.82 5654.18,1925.82 5870,1710 5990,1710 R2_1.2@6004,1724 ; U7.17@5648.94,1924.4 cw(c5648.94,1908.32) 5660.31,1919.69 ; 5989.83,1710.83 ccw(c5963.86,1736.81) R2_1.2@6000.39,1740.68 ; 5990.83,1710.83 cw(c6016.25,1685.41) R2_1.2@6020.65,1721.09 ; R2_1.2@5999.97,1719.97 cw(c6017.48,1702.47) R2_1.2@6020.51,1727.04 ; R2_1.2@6000.2,1720.2 ccw(c5982.6,1737.8) R2_1.2@6007.35,1740.42 ; U7.17@5649.52,1924.53 cw(c5652.2,1918.61) 5656.8,1923.2 ccw(c5652.2,1918.61) U7.17@5649.52,1924.53
DP2_1: R2_1.1 USB2-4.3 | length 774.7
  Top Layer w7: R2_1.1@6131,1720 6139,1712 6166.2,1712 6190,1735.8 6190,1891.2 6146,1935.2 6146,2060.41 6186.59,2101 6218,2101 USB2-4.3@6247,2130 ; 6225.14,2108.14 cw(c6241.96,2091.31) USB2-4.3@6247.33,2114.49 ; USB2-4.3@6225.9,2130.99 cw(c6191.8,2125.62) 6216.21,2101.21 cw(c6238.61,2078.81) USB2-4.3@6245.75,2109.67 ; 6225.94,2108.94 ccw(c6208.61,2126.27) USB2-4.3@6232.82,2130.07 ; 6137.04,1713.96 cw(c6149.57,1726.49) 6133.25,1733.4 ccw(c6149.57,1726.49) 6137.04,1713.96 ; 6137.04,1713.96 ccw(c6120.91,1697.83) 6116.84,1720.28 cw(c6120.91,1697.83) 6137.04,1713.96 ; R2_1.1@6126.8,1736.13 ccw(c6139.25,1730.86) 6129.69,1721.31 cw(c6139.25,1730.86) R2_1.1@6126.8,1736.13
DP3: R3_1.2 U7.14 | length 497.4
  Top Layer w7: U7.14@5623.35,1866.77 5653.37,1866.77 5694,1826.14 5694,1620.41 5715.41,1599 5746,1599 R3_1.2@5758,1611 ; R3_1.2@5753.62,1626.04 cw(c5722.35,1620.31) 5744.83,1597.83 cw(c5769.84,1572.83) R3_1.2@5773.23,1608.03 ; R3_1.2@5754.27,1607.27 ccw(c5738.3,1623.23) R3_1.2@5760.51,1627.3 ; R3_1.2@5755.32,1608.32 cw(c5771.68,1591.97) R3_1.2@5773.91,1614.99 ; U7.14@5648.94,1865.35 cw(c5648.94,1851.21) 5658.93,1861.21 ccw(c5648.94,1851.21) U7.14@5648.94,1865.35
DP3_1: R3_1.1 USB2-4.7 | length 1744.5
  Top Layer w7: R3_1.1@5866,1607 5884,1607 5897,1594 6168,1594 6229,1655 6229,1855 6293,1919 6293,2071.27 USB2-4.7@6354.76,2133.03 ; R3_1.1@5866.14,1614.93 cw(c5866.49,1591.81) R3_1.1@5882.84,1608.16 ; R3_1.1@5866.14,1614.93 cw(c5866.49,1591.81) R3_1.1@5882.84,1608.16 ; R3_1.1@5866.14,1614.93 cw(c5866.49,1591.81) R3_1.1@5882.84,1608.16 ; R3_1.1@5866.25,1607.93 cw(c5866.85,1568.77) 5894.54,1596.46 ; R3_1.1@5866.25,1607.93 cw(c5866.85,1568.77) 5894.54,1596.46 ; R3_1.1@5866.25,1607.93 cw(c5866.85,1568.77) 5894.54,1596.46 ; R3_1.1@5880.46,1626.02 ccw(c5901.34,1620.28) R3_1.1@5886.03,1604.97 ; R3_1.1@5880.46,1626.02 ccw(c5901.34,1620.28) R3_1.1@5886.03,1604.97 ; R3_1.1@5880.46,1626.02 ccw(c5901.34,1620.28) R3_1.1@5886.03,1604.97 ; R3_1.1@5887.21,1624.16 ccw(c5914.69,1616.62) 5894.54,1596.46 ; R3_1.1@5887.21,1624.16 ccw(c5914.69,1616.62) 5894.54,1596.46 ; R3_1.1@5887.21,1624.16 ccw(c5914.69,1616.62) 5894.54,1596.46 ; 6310.33,2088.6 cw(c6354.76,2044.17) USB2-4.7@6354.76,2107 ; 6310.33,2088.6 ccw(c6265.9,2133.03) USB2-4.7@6328.74,2133.03 ; 6310.33,2088.6 cw(c6354.76,2044.17) USB2-4.7@6354.76,2107 ; 6310.33,2088.6 ccw(c6265.9,2133.03) USB2-4.7@6328.74,2133.03 ; 6310.33,2088.6 ccw(c6265.9,2133.03) USB2-4.7@6328.74,2133.03 ; 6310.33,2088.6 cw(c6354.76,2044.17) USB2-4.7@6354.76,2107 ; 6322.28,2100.55 cw(c6354.76,2068.07) USB2-4.7@6354.76,2114 ; 6322.28,2100.55 ccw(c6289.8,2133.03) USB2-4.7@6335.74,2133.03 ; 6322.28,2100.55 cw(c6354.76,2068.07) USB2-4.7@6354.76,2114 ; 6322.28,2100.55 ccw(c6289.8,2133.03) USB2-4.7@6335.74,2133.03 ; 6322.28,2100.55 ccw(c6289.8,2133.03) USB2-4.7@6335.74,2133.03 ; 6322.28,2100.55 cw(c6354.76,2068.07) USB2-4.7@6354.76,2114
DP4: R4_1.2 U7.12 | length 621.3
  Top Layer w7: U7.12@5573.15,1796.89 5573.15,1656.85 5809,1421 5843,1421 R4_1.2@5854,1432 ; R4_1.2@5851.45,1447.15 cw(c5819.67,1443) 5842.33,1420.33 cw(c5863.13,1399.53) R4_1.2@5868.97,1428.36 ; R4_1.2@5851.55,1429.55 cw(c5866.24,1414.87) R4_1.2@5870.36,1435.22 ; R4_1.2@5852.38,1430.38 ccw(c5837.44,1445.32) R4_1.2@5858.39,1448.06
DP4_1: R4_1.1 USB2-4.11 | length 1845
  Top Layer w7: R4_1.1@5966.13,1435.09 cw(c5969.16,1414.74) R4_1.1@5983.71,1429.29 ; R4_1.1@5967.16,1428.17 cw(c5971.71,1397.64) 5993.54,1419.46 cw(c6014.11,1440.04) R4_1.1@5985.57,1445.71 ; R4_1.1@5978.71,1447.07 ccw(c5998.66,1443.11) R4_1.1@5984.28,1428.72 ; R4_1.1@5981,1433 5981,1432 5994,1419 6120.59,1419 6429,1727.41 6429,1883.59 6400,1912.59 6400,2065 6457.91,2122.91 USB2-4.11@6457.91,2133.03 ; 6406.33,2071.33 ccw(c6344.62,2133.03) USB2-4.11@6431.89,2133.03 ; 6406.33,2071.33 ccw(c6344.62,2133.03) USB2-4.11@6431.89,2133.03 ; 6406.33,2071.33 ccw(c6344.62,2133.03) USB2-4.11@6431.89,2133.03 ; 6418.28,2083.28 ccw(c6368.52,2133.03) USB2-4.11@6438.89,2133.03 ; 6418.28,2083.28 ccw(c6368.52,2133.03) USB2-4.11@6438.89,2133.03 ; 6418.28,2083.28 ccw(c6368.52,2133.03) USB2-4.11@6438.89,2133.03 ; 6430.23,2095.23 ccw(c6392.42,2133.03) USB2-4.11@6445.89,2133.03 ; 6430.23,2095.23 ccw(c6392.42,2133.03) USB2-4.11@6445.89,2133.03 ; 6430.23,2095.23 ccw(c6392.42,2133.03) USB2-4.11@6445.89,2133.03 ; 6430.75,2095.75 cw(c6457.91,2068.6) USB2-4.11@6457.91,2107 ; 6430.75,2095.75 cw(c6457.91,2068.6) USB2-4.11@6457.91,2107 ; 6430.75,2095.75 cw(c6457.91,2068.6) USB2-4.11@6457.91,2107 ; 6442.18,2107.18 ccw(c6416.32,2133.03) USB2-4.11@6452.89,2133.03 ; 6442.18,2107.18 ccw(c6416.32,2133.03) USB2-4.11@6452.89,2133.03 ; 6442.18,2107.18 ccw(c6416.32,2133.03) USB2-4.11@6452.89,2133.03 ; 6442.7,2107.7 cw(c6457.91,2092.49) USB2-4.11@6457.91,2114 ; 6442.7,2107.7 cw(c6457.91,2092.49) USB2-4.11@6457.91,2114 ; 6442.7,2107.7 cw(c6457.91,2092.49) USB2-4.11@6457.91,2114
DP5: R5_1.2 U7.33 | length 668.2
  Top Layer w7: U7.33@5415.67,2118 U7.33@5415.67,2113.81 5415.67,2292.47 5597.2,2474 5693,2474 R5_1.2@5701,2482 ; 5695.33,2476.33 cw(c5712.48,2459.18) 5716.08,2483.17 ccw(c5712.48,2459.18) 5695.33,2476.33 ; 5695.33,2476.33 ccw(c5682.63,2489.03) 5699.1,2496.2 cw(c5682.63,2489.03) 5695.33,2476.33 ; R5_1.2@5702.6,2483.6 ccw(c5692.76,2493.44) 5705.52,2498.99 cw(c5692.76,2493.44) R5_1.2@5702.6,2483.6
DP5_1: R5_1.1 USB5-7.3 | length 825.5
  Top Layer w7: R5_1.1@5828,2483 5838,2473 5919,2473 6174,2728 6211.58,2728 ; USB5-7.3@6224.71,2764.54 cw(c6179.4,2760.18) 6211.58,2728 ; USB5-7.3@6231.67,2765.21 cw(c6198.55,2762.03) 6222.08,2738.5 cw(c6245.61,2714.97) USB5-7.3@6248.79,2748.09 ; USB5-7.3@6248.12,2741.12 ccw(c6243.77,2695.82) 6211.58,2728 ; USB5-7.3@6250.61,2767.03 6211.58,2728 ; 5836.04,2474.96 cw(c5851.65,2490.58) 5830.78,2497.79 ccw(c5851.65,2490.58) 5836.04,2474.96 ; 5836.04,2474.96 ccw(c5815.94,2454.86) 5812.55,2483.08 cw(c5815.94,2454.86) 5836.04,2474.96 ; R5_1.1@5824.17,2500.08 ccw(c5839.9,2494.64) 5828.13,2482.87 cw(c5839.9,2494.64) R5_1.1@5824.17,2500.08
DP6: R6_1.2 U7.35 | length 890.4
  Top Layer w7: U7.35@5377,2107 5377,2312.8 5535.31,2471.11 5535.31,2761.11 5619.2,2845 5648,2845 R6_1.2@5658,2855 ; U7.35@5375.29,2140.41 ccw(c5371.18,2144.53) 5377,2144.53 cw(c5371.18,2144.53) U7.35@5375.29,2140.41
DP6_1: R6_1.1 USB5-7.7 | length 746.7
  Top Layer w7: R6_1.1@5781,2853 5793,2853 5800.05,2845.95 5801.11,2847 6197.41,2847 6220.41,2824 6274.41,2824 6319,2779.41 6319,2778 6329.97,2767.03 USB5-7.7@6353.76,2767.03 ; 5799.09,2846.91 cw(c5815.65,2863.47) 5793.14,2869.92 ccw(c5815.65,2863.47) 5799.09,2846.91 ; 5799.09,2846.91 ccw(c5780.36,2828.18) 5775.75,2854.26 cw(c5780.36,2828.18) 5799.09,2846.91 ; R6_1.1@5786.41,2871.85 ccw(c5802.59,2867.21) 5790.69,2855.31 cw(c5802.59,2867.21) R6_1.1@5786.41,2871.85
DP7: R7_1.2 U7.38 | length 1431.8
  Top Layer w7: R7_1.2@5916,2970 5903,2957 5653.62,2957 5243,2546.38 5243,2073 5272,2044 ; 5272,2044 5272.07,2043.93 U7.38@5306.42,2043.93 5272,2044
DP7_1: R7_1.1 USB5-7.11 | length 543.3
  Top Layer w7: R7_1.1@6045,2968 6047,2968 6061,2954 6247.8,2954 6274.8,2927 6372.41,2927 6411,2888.41 6411,2778 USB5-7.11@6435,2754
DRV: U7.1
ERX+: C105.2 CR3.6 J6.7 J80.43 JP44.35 | length 6456.9
  Top Layer w7: JP44.35@3738,3160 JP44.35@3740.5,3157.5 ; C105.2@5781,3558.65 5808.35,3586 ; 5790.35,3586 5808.35,3586 ; CR3.6@5860,3504 v1@5860,3586 ; C105.2@5776.61,3561.11 cw(c5815.38,3543.36) 5815.38,3586 ; C105.2@5776.61,3561.11 cw(c5815.38,3543.36) 5815.38,3586 ; C105.2@5776.61,3561.11 cw(c5815.38,3543.36) 5815.38,3586 ; C105.2@5782.98,3558.19 cw(c5826.29,3538.36) 5826.29,3586 ; C105.2@5782.98,3558.19 cw(c5826.29,3538.36) 5826.29,3586 ; C105.2@5782.98,3558.19 cw(c5826.29,3538.36) 5826.29,3586 ; C105.2@5787.24,3580.1 ccw(c5792.56,3601.79) 5808.35,3586 ; C105.2@5787.24,3580.1 ccw(c5792.56,3601.79) 5808.35,3586 ; C105.2@5787.24,3580.1 ccw(c5792.56,3601.79) 5808.35,3586 ; C105.2@5789.34,3555.28 cw(c5837.19,3533.37) 5837.19,3586 ; C105.2@5789.34,3555.28 cw(c5837.19,3533.37) 5837.19,3586 ; C105.2@5789.34,3555.28 cw(c5837.19,3533.37) 5837.19,3586 ; C105.2@5795.7,3552.36 cw(c5848.09,3528.38) 5848.09,3586 ; C105.2@5795.7,3552.36 cw(c5848.09,3528.38) 5848.09,3586 ; C105.2@5795.7,3552.36 cw(c5848.09,3528.38) 5848.09,3586 ; C105.2@5796.42,3563.04 cw(c5810.52,3567.33) C105.2@5800.1,3577.75 ; C105.2@5796.42,3563.04 cw(c5810.52,3567.33) C105.2@5800.1,3577.75 ; C105.2@5796.42,3563.04 cw(c5810.52,3567.33) C105.2@5800.1,3577.75 ; C105.2@5802.07,3549.45 cw(c5859,3523.39) v1(5859,3586) ; C105.2@5802.07,3549.45 cw(c5859,3523.39) v1(5859,3586) ; C105.2@5802.07,3549.45 cw(c5859,3523.39) v1(5859,3586) ; C105.2@5803.12,3565.07 cw(c5823.18,3571.17) 5808.35,3586 ; C105.2@5803.12,3565.07 cw(c5823.18,3571.17) 5808.35,3586 ; C105.2@5803.12,3565.07 cw(c5823.18,3571.17) 5808.35,3586 ; 5808.35,3586 v1(5859,3586) ; 5843.31,3586 cw(c5843.31,3570.31) v1@5854.4,3581.4 ; 5843.31,3586 ccw(c5843.31,3601.69) v1@5854.4,3590.6 ; 5843.31,3586 cw(c5843.31,3570.31) v1@5854.4,3581.4 ; 5843.31,3586 ccw(c5843.31,3601.69) v1@5854.4,3590.6 ; 5843.31,3586 ccw(c5843.31,3601.69) v1@5854.4,3590.6 ; 5843.31,3586 cw(c5843.31,3570.31) v1@5854.4,3581.4 ; v1@5854.4,3581.4 cw(c5840.89,3567.89) 5860,3567.89 ; v1@5854.4,3581.4 cw(c5840.89,3567.89) 5860,3567.89 ; v1@5854.4,3581.4 cw(c5840.89,3567.89) 5860,3567.89 ; CR3.6@5856.11,3518.33 ccw(c5846.73,3527.71) 5860,3527.71 ; CR3.6@5856.11,3518.33 ccw(c5846.73,3527.71) 5860,3527.71 ; CR3.6@5856.11,3518.33 ccw(c5846.73,3527.71) 5860,3527.71 ; 5860,3530.6 ccw(c5877.36,3530.6) CR3.6@5865.08,3518.33 ; 5860,3530.6 ccw(c5877.36,3530.6) CR3.6@5865.08,3518.33 ; 5860,3530.6 ccw(c5877.36,3530.6) CR3.6@5865.08,3518.33 ; 5860,3572.72 cw(c5872.28,3572.72) v1@5863.6,3581.4 ; 5860,3572.72 cw(c5872.28,3572.72) v1@5863.6,3581.4 ; 5860,3572.72 cw(c5872.28,3572.72) v1@5863.6,3581.4
  Top Layer w10: JP44.35@3739,3156 3770,3125 3770,2700.96 4070.47,2400.49 J80.43@4122.45,2400.49 ; JP44.35@3740.56,3139.74 cw(c3740.56,3104.24) 3765.66,3129.34 ccw(c3740.56,3104.24) JP44.35@3740.56,3139.74 ; JP44.35@3758.93,3155.32 ccw(c3791.09,3150.01) 3768.04,3126.96 cw(c3791.09,3150.01) JP44.35@3758.93,3155.32
  Bottom Layer w7: JP44.35@3738,3162 3749,3162 3773,3186 ; 5848,3586 v1(5859,3586) v1@5860,3586 ; v1@5856,3582 v1@5860,3586 ; v1@5859.34,3593.36 ccw(c5865.11,3620.89) 5885,3601 5871,3587 ; v1@5860.34,3592.36 ccw(c5866.11,3619.89) 5886,3600 ; 5872,3586 v1@5860,3586 ; J6.7@6276,3537 J6.7@6276,3554 ; 3773,3186 cw(c3751.78,3207.21) 3745.06,3177.97 ccw(c3751.78,3207.21) 3773,3186 ; JP44.35@3743.5,3171.15 ccw(c3748.44,3192.67) 3764.06,3177.06 cw(c3748.44,3192.67) JP44.35@3743.5,3171.15 ; JP44.35@3753.68,3158.36 cw(c3773.76,3158.36) 3759.56,3172.56 ccw(c3773.76,3158.36) JP44.35@3753.68,3158.36 ; JP44.35@3760.68,3158.36 cw(c3797.66,3158.36) 3771.51,3184.51 ccw(c3797.66,3158.36) JP44.35@3760.68,3158.36 ; v1@5858.9,3585.51 ccw(c5862.94,3604.77) 5876.86,3590.86 cw(c5862.94,3604.77) v1@5858.9,3585.51
  Bottom Layer w10: JP44.35@3740.56,3158.36 3746.36,3158.36 3773,3185 ; JP44.35@3742.36,3166.79 ccw(c3746.4,3185.61) 3760,3172 ; JP44.35@3744.46,3176.57 ccw(c3750.98,3207.02) 3773,3185 ; JP44.35@3759.18,3158.36 cw(c3790.12,3158.36) 3768.24,3180.24 ; 5839.69,3589 cw(c5839.69,3566.69) v1@5855.46,3582.46 ; v1@5858.56,3581.02 ccw(c5860.02,3597.61) 5871.79,3585.83 ; v1@5859.44,3590.98 ccw(c5862.45,3625.5) 5886.96,3601 ; v1@5862.74,3582.68 cw(c5873.46,3573.17) 5873.46,3587.5 5846.03,3587.5 5844.53,3589 ; 5870.46,3586.5 5885.64,3601.68 ; 5888.64,3602.68 6112.68,3602.68 6144,3634 6199,3634 6277,3556 J6.7@6277,3540 ; 3773,3185 3773,3208.41 4153.59,3589 5844.53,3589 ; 5844.54,3589 cw(c5844.54,3576.92) 5854.76,3583.34 ccw(c5844.54,3576.92) 5844.54,3589 ; 6228.18,3604.82 cw(c6162.35,3539) J6.7@6255.44,3539 ; 6228.18,3604.82 cw(c6162.35,3539) J6.7@6255.44,3539 ; 6228.18,3604.82 cw(c6162.35,3539) J6.7@6255.44,3539 ; 6245.25,3587.75 cw(c6196.49,3539) J6.7@6265.44,3539 ; 6245.25,3587.75 cw(c6196.49,3539) J6.7@6265.44,3539 ; 6245.25,3587.75 cw(c6196.49,3539) J6.7@6265.44,3539 ; 6262.32,3570.68 cw(c6230.64,3539) J6.7@6275.44,3539 ; 6262.32,3570.68 cw(c6230.64,3539) J6.7@6275.44,3539 ; 6262.32,3570.68 cw(c6230.64,3539) J6.7@6275.44,3539 ; 6266.8,3566.2 ccw(c6278,3577.39) J6.7@6278,3561.56 ; 6266.8,3566.2 ccw(c6278,3577.39) J6.7@6278,3561.56 ; 6266.8,3566.2 ccw(c6278,3577.39) J6.7@6278,3561.56
ERX-: C104.2 CR3.4 J6.8 J80.42 JP44.36 | length 4908.8
  Top Layer w7: C104.2@5694,3558.65 5753.35,3618 5894,3618 5932,3580 v1(5931,3579) ; CR3.4@5933,3504 v1@5933,3580 ; C104.2@5694.98,3573.74 ccw(c5694.98,3607.79) C104.2@5719.06,3583.71 ; C104.2@5694.98,3573.74 ccw(c5694.98,3607.79) C104.2@5719.06,3583.71 ; C104.2@5694.98,3573.74 ccw(c5694.98,3607.79) C104.2@5719.06,3583.71 ; C104.2@5694.98,3580.74 ccw(c5694.98,3631.69) 5731.01,3595.66 ; C104.2@5694.98,3580.74 ccw(c5694.98,3631.69) 5731.01,3595.66 ; C104.2@5694.98,3580.74 ccw(c5694.98,3631.69) 5731.01,3595.66 ; C104.2@5710.07,3558.65 cw(c5748.88,3558.65) 5721.44,3586.09 ; C104.2@5710.07,3558.65 cw(c5748.88,3558.65) 5721.44,3586.09 ; C104.2@5710.07,3558.65 cw(c5748.88,3558.65) 5721.44,3586.09 ; C104.2@5717.07,3558.65 cw(c5772.78,3558.65) 5733.39,3598.04 ; C104.2@5717.07,3558.65 cw(c5772.78,3558.65) 5733.39,3598.04 ; C104.2@5717.07,3558.65 cw(c5772.78,3558.65) 5733.39,3598.04 ; 5918.49,3593.51 cw(c5903.98,3579) v1@5924.5,3579 ; 5918.49,3593.51 cw(c5903.98,3579) v1@5924.5,3579 ; 5918.49,3593.51 cw(c5903.98,3579) v1@5924.5,3579 ; 5923.32,3588.68 ccw(c5931,3596.36) v1@5931,3585.5 ; 5923.32,3588.68 ccw(c5931,3596.36) v1@5931,3585.5 ; 5923.32,3588.68 ccw(c5931,3596.36) v1@5931,3585.5 ; v1@5926.4,3574.4 cw(c5910.48,3558.48) 5933,3558.48 ; v1@5926.4,3574.4 cw(c5910.48,3558.48) 5933,3558.48 ; v1@5926.4,3574.4 cw(c5910.48,3558.48) 5933,3558.48 ; 5933,3534.95 ccw(c5956.51,3534.95) CR3.4@5939.89,3518.33 ; 5933,3534.95 ccw(c5956.51,3534.95) CR3.4@5939.89,3518.33 ; 5933,3534.95 ccw(c5956.51,3534.95) CR3.4@5939.89,3518.33 ; 5933,3568.14 cw(c5941.86,3568.14) v1@5935.6,3574.4 ; 5933,3568.14 cw(c5941.86,3568.14) v1@5935.6,3574.4 ; 5933,3568.14 cw(c5941.86,3568.14) v1@5935.6,3574.4
  Top Layer w10: JP44.36@3822,3158 3789,3125 3789,2706 4074.83,2420.17 J80.42@4122.45,2420.17 ; 3790.53,3126.53 ccw(c3765.13,3151.93) 3800.8,3156.17 cw(c3765.13,3151.93) 3790.53,3126.53 ; 3792.74,3128.74 cw(c3819.3,3102.18) 3819.3,3139.74 ccw(c3819.3,3102.18) 3792.74,3128.74
  Bottom Layer w7: J6.8@6175,3587 J6.8@6184,3587
  Bottom Layer w10: JP44.36@3800.71,3159.5 ccw(c3764.19,3161.73) 3790.06,3187.6 ; JP44.36@3818.16,3176.95 cw(c3815.93,3213.47) 3790.06,3187.6 ; JP44.36@3819.3,3158.36 3790.06,3187.6 ; 5890.5,3580.46 5873.04,3563 5846.49,3563 5837.49,3572 4160.63,3572 3790.06,3201.43 3790.06,3187.6 ; 5890.5,3580.5 5893,3583 6171,3583 6175,3587 J6.8@6176,3588 ; v1@5934.54,3575.46 cw(c5952.73,3557.27) 5952.73,3583 ; 6100.75,3583 ccw(c6100.75,3666.25) J6.8@6159.62,3607.38 ; 6124.89,3583 ccw(c6124.89,3642.11) J6.8@6166.69,3600.31 ; 6129.72,3583 cw(c6129.72,3540.72) J6.8@6159.62,3570.62 ; 5909.27,3583 cw(c5909.27,3557.27) 5927.46,3575.46 ccw(c5909.27,3557.27) 5909.27,3583
ETX+: C106.2 CR3.1 J6.1 J80.45 JP44.33 | length 5634.4
  Top Layer w7: CR3.1@5860.6,3394 5860.6,3304.4 5883,3282 v1(5883,3261) C106.2@5883,3195 ; CR3.1@5856.11,3379.67 cw(c5845.29,3368.85) 5860.6,3368.85 ; CR3.1@5856.11,3379.67 cw(c5845.29,3368.85) 5860.6,3368.85 ; CR3.1@5856.11,3379.67 cw(c5845.29,3368.85) 5860.6,3368.85 ; 5860.6,3368.85 cw(c5875.91,3368.85) CR3.1@5865.08,3379.67 ; 5860.6,3368.85 cw(c5875.91,3368.85) CR3.1@5865.08,3379.67 ; 5860.6,3368.85 cw(c5875.91,3368.85) CR3.1@5865.08,3379.67 ; C106.2@5874.39,3205.27 ccw(c5853.62,3226.04) 5883,3226.04 ; C106.2@5874.39,3205.27 ccw(c5853.62,3226.04) 5883,3226.04 ; C106.2@5874.39,3205.27 ccw(c5853.62,3226.04) 5883,3226.04 ; v1@5878.4,3256.4 cw(c5867.31,3245.31) 5883,3245.31 ; v1@5878.4,3256.4 cw(c5867.31,3245.31) 5883,3245.31 ; v1@5878.4,3256.4 cw(c5867.31,3245.31) 5883,3245.31 ; v1@5878.4,3265.6 ccw(c5867.31,3276.69) 5883,3276.69 ; v1@5878.4,3265.6 ccw(c5867.31,3276.69) 5883,3276.69 ; v1@5878.4,3265.6 ccw(c5867.31,3276.69) 5883,3276.69 ; 5883,3226.11 ccw(c5926.48,3226.11) C106.2@5895.74,3195.37 ; 5883,3226.11 ccw(c5926.48,3226.11) C106.2@5895.74,3195.37 ; 5883,3226.11 ccw(c5926.48,3226.11) C106.2@5895.74,3195.37 ; 5883,3243.01 ccw(c5943.38,3243.01) C106.2@5900.69,3200.32 ; 5883,3243.01 ccw(c5943.38,3243.01) C106.2@5900.69,3200.32 ; 5883,3243.01 ccw(c5943.38,3243.01) C106.2@5900.69,3200.32 ; 5883,3245.31 cw(c5898.69,3245.31) v1@5887.6,3256.4 ; 5883,3245.31 cw(c5898.69,3245.31) v1@5887.6,3256.4 ; 5883,3245.31 cw(c5898.69,3245.31) v1@5887.6,3256.4 ; v1@5883,3259.91 ccw(c5960.28,3259.91) C106.2@5905.64,3205.27 ; v1@5883,3259.91 ccw(c5960.28,3259.91) C106.2@5905.64,3205.27 ; v1@5883,3259.91 ccw(c5960.28,3259.91) C106.2@5905.64,3205.27 ; 5883,3276.69 ccw(c5898.69,3276.69) v1@5887.6,3265.6 ; 5883,3276.69 ccw(c5898.69,3276.69) v1@5887.6,3265.6 ; 5883,3276.69 ccw(c5898.69,3276.69) v1@5887.6,3265.6
  Top Layer w10: JP44.33@3583.08,3158.36 3583.08,3153.42 3609.5,3127 3609.5,2789.5 4035.18,2363.82 ; 4038,2361 J80.45@4129,2361 ; JP44.33@3583.08,3139.74 cw(c3583.08,3106.71) 3606.44,3130.06 ccw(c3583.08,3106.71) JP44.33@3583.08,3139.74 ; JP44.33@3600.96,3153.16 ccw(c3624,3146.44) 3607.03,3129.47 cw(c3624,3146.44) JP44.33@3600.96,3153.16
  Bottom Layer w7: J6.1@6272,3239 J6.1@6278,3239
  Bottom Layer w10: JP44.33@3583.08,3158.36 3664.76,3076.68 3919.72,3076.68 4150.54,3307.5 5631.79,3307.5 5670.79,3268.5 5672.5,3268.5 5678,3263 6125,3263 6149,3239 6272,3239 J6.1@6274,3237 ; 3614.87,3126.57 cw(c3646.66,3158.36) 3601.7,3158.36 ccw(c3646.66,3158.36) 3614.87,3126.57 ; 3614.87,3126.57 ccw(c3583.08,3094.78) 3583.08,3139.74 cw(c3583.08,3094.78) 3614.87,3126.57 ; 6215.23,3239 cw(c6215.23,3176.23) J6.1@6259.62,3220.62 ; 6215.23,3239 ccw(c6215.23,3301.77) J6.1@6259.62,3257.38 ; 6215.23,3239 cw(c6215.23,3176.23) J6.1@6259.62,3220.62 ; 6215.23,3239 ccw(c6215.23,3301.77) J6.1@6259.62,3257.38 ; 6215.23,3239 ccw(c6215.23,3301.77) J6.1@6259.62,3257.38 ; 6215.23,3239 cw(c6215.23,3176.23) J6.1@6259.62,3220.62 ; 6239.37,3239 cw(c6239.37,3200.37) J6.1@6266.69,3227.69 ; 6239.37,3239 ccw(c6239.37,3277.63) J6.1@6266.69,3250.31 ; 6239.37,3239 cw(c6239.37,3200.37) J6.1@6266.69,3227.69 ; 6239.37,3239 ccw(c6239.37,3277.63) J6.1@6266.69,3250.31 ; 6239.37,3239 ccw(c6239.37,3277.63) J6.1@6266.69,3250.31 ; 6239.37,3239 cw(c6239.37,3200.37) J6.1@6266.69,3227.69 ; 5866.1,3263 cw(c5866.1,3244.1) 5879.46,3257.46 ccw(c5866.1,3244.1) 5866.1,3263 ; v1@5886.54,3257.46 cw(c5899.9,3244.1) 5899.9,3263 ccw(c5899.9,3244.1) v1@5886.54,3257.46